# EAGLE board Ubo_side_v1.4 (EAGLE 9.6.2)
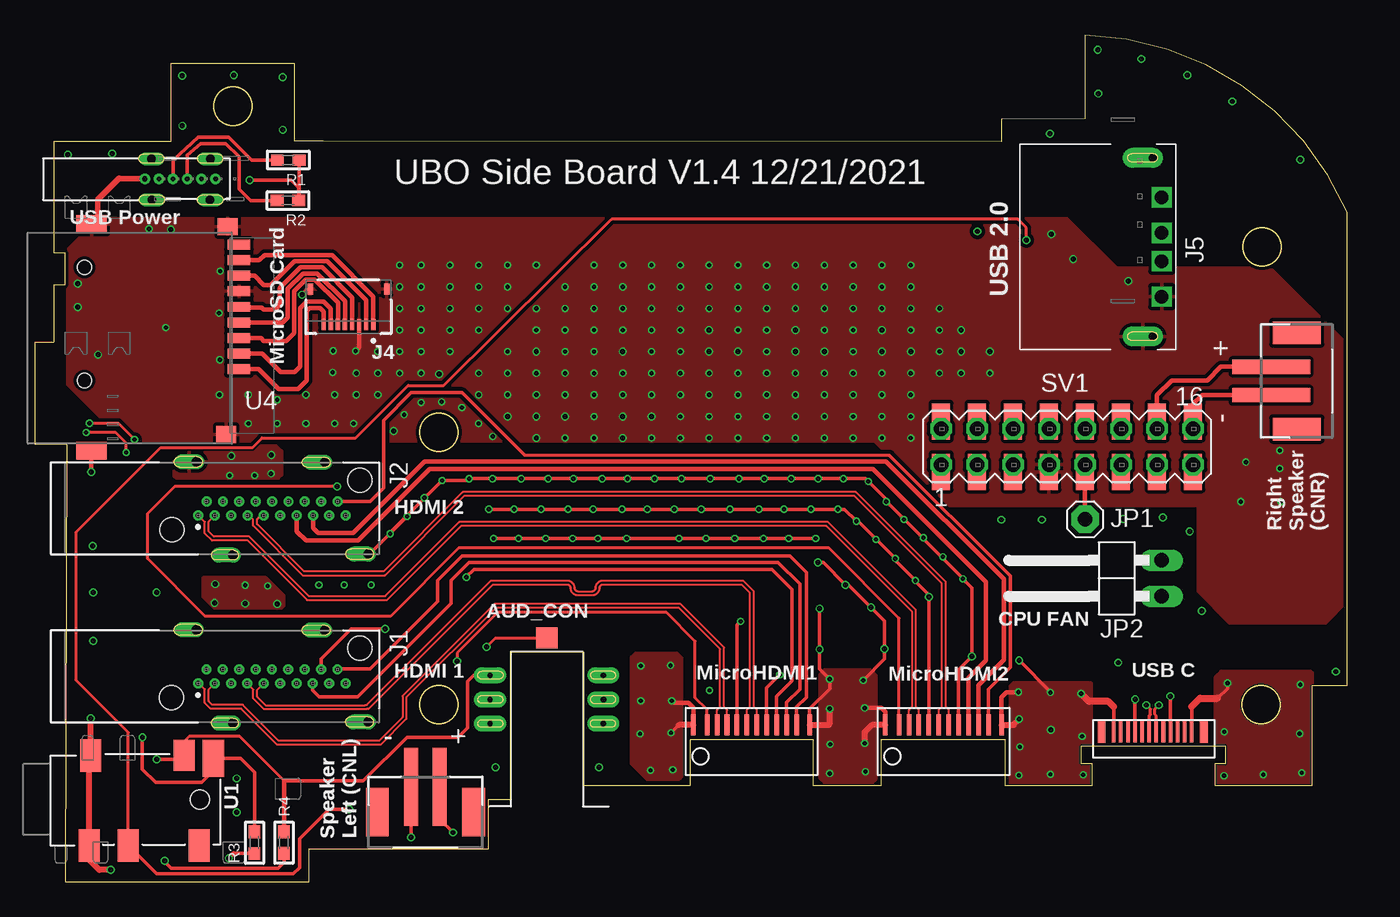
[diagram p0: board, top side]
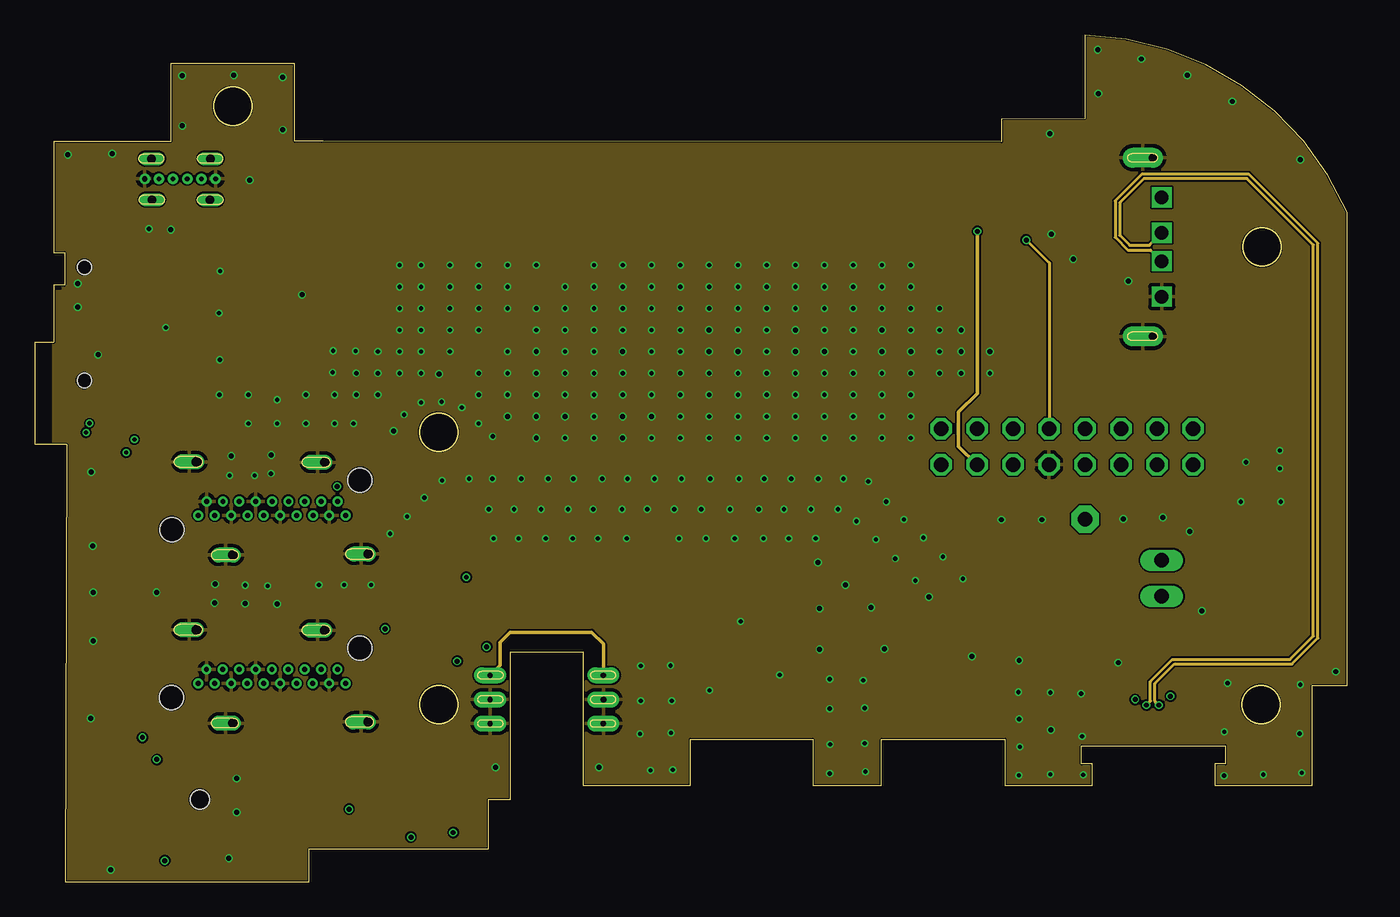
[diagram p1: board, inner layer Route2]
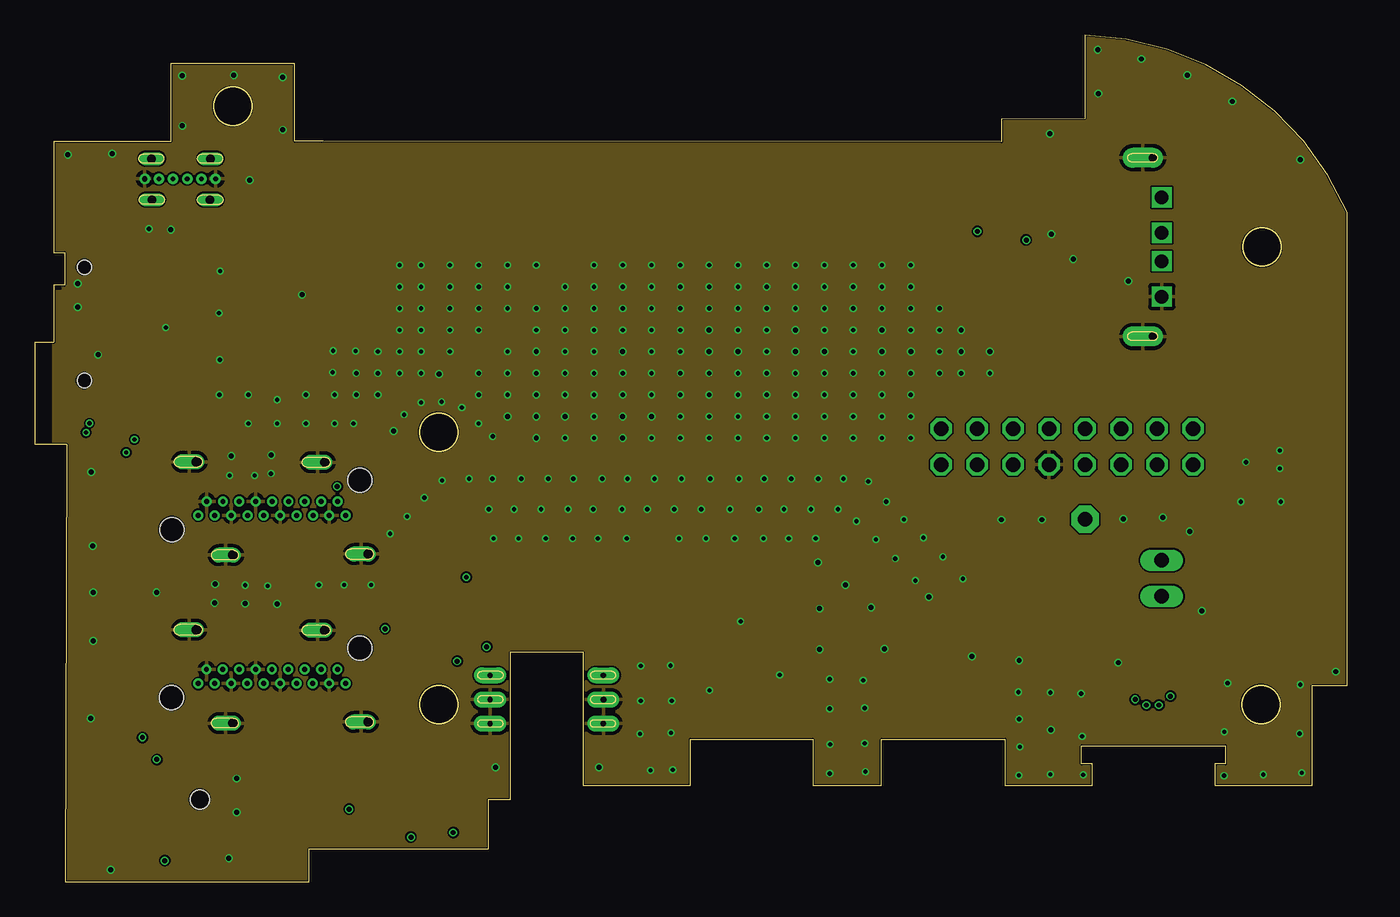
[diagram p2: board, inner layer Route15]
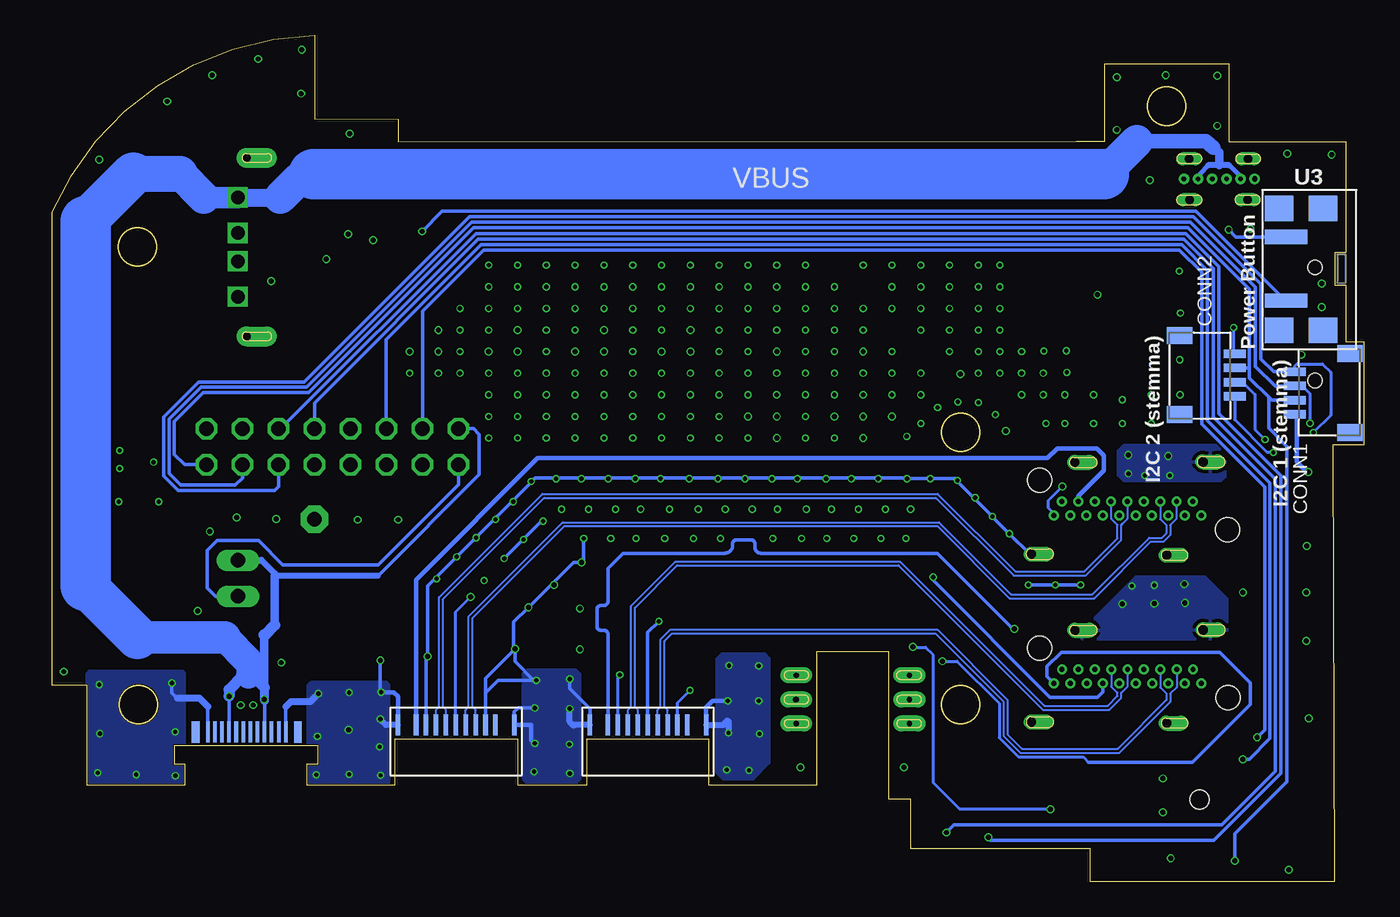
[diagram p3: board, bottom side, seen from below]

Size 92.54 x 59.7 mm. Coordinates in mm from the lower left corner, seen from the top.
Outline: 20.22,52.23 18.3,52.23 18.3,57.71 9.55,57.71 9.55,52.21 1.3,52.21 1.3,44.39 2.06,44.39 2.06,42.08 1.3,42.08 1.3,38.05 0,38.05 0,30.85 2.2,30.85 2.1,0 19.3,0 19.3,2.3 31.97,2.3 31.97,5.8 33.53,5.8 33.53,16.2 38.63,16.2 38.63,6.8 46.2,6.8 46.2,10.04 54.85,10.04 54.85,6.8 59.7,6.8 59.7,10.04 68.4,10.04 68.4,6.8 74.55,6.8 74.55,8.3 73.8,8.3 73.8,9.58 83.95,9.58 83.95,8.3 83.2,8.3 83.2,6.8 90.08,6.8 90.08,13.84 92.54,13.84 92.54,47.22 91.18,49.83 89.47,52.23 87.43,54.35 85.11,56.17 82.56,57.64 79.83,58.73 76.97,59.42 74.04,59.7 74.04,53.84 68.14,53.79 68.14,52.2 20.3,52.25 20.22,52.23
Outline: circle at 13.93,54.71 radius 1.35
Outline: circle at 28.45,31.71 radius 1.35
Outline: circle at 28.45,12.49 radius 1.35
Outline: circle at 86.53,44.78 radius 1.35
Outline: circle at 86.45,12.49 radius 1.35
Copper layers (1*2*15*16): Top 0.035mm / dielectric 0.2mm / Route2 0.0175mm / dielectric 0.465mm / Route15 0.0175mm / dielectric 0.2mm / Bottom 0.035mm
Design rules "jlcpcb-4layers *": minimum track width 5mil, minimum drill 0.2mm, track to track 0.126490625mm, track to pad 0.126490625mm, pad to pad 0.126490625mm, via to via 0.126490625mm, smd to smd 0mil, copper to edge 0.1mm, drill to drill 5mil, minimum pad ring 4mil, minimum via ring 4mil, stop-mask expansion 3mil, vias tented up to drill 100mil, thermal gap 10mil
Net classes: 1 SD CARD: width 0.305 mm

## Footprints (pad centres in the part's own frame; a part is rotated, then mirrored left to right if it is on the bottom)
AUDIO_3.5MM_JACK_MALE = drill 0.381 pad 1.13 long: P$1L 4.95,4; P$1R 4.95,-4; P$2R 3.25,-4; P$3L 1.55,4; P$3R 1.55,-4 | drill 0.4 pad 1.13 long: P$2L 3.25,4 | smd 1.5 x 1.5: P$4 -1.09,0
JST-PH-2-SMT = smd 1 x 5.5: 1 -1,-1.8; 2 1,-1.8 | smd 1.6 x 3.4: NC1 -3.4,0; NC2 3.4,0
JST_SH4 = smd 0.6 x 1.55: 1 -1.5,2.514; 2 -0.5,2.514; 3 0.5,2.514; 4 1.5,2.514 | smd 1.2 x 1.8: MT1 -2.8,-1.386; MT2 2.8,-1.386
CONN_KDMIX-SL1-NS-WS-B15 = drill 0.35 pad 0.7: 1 0.5,-4.725; 2 -0.5,-4.147; 3 0.5,-3.57; 4 -0.5,-2.992; 5 0.5,-2.415; 6 -0.5,-1.837; 7 0.5,-1.26; 8 -0.5,-0.682; 9 0.5,-0.105; 10 -0.5,0.473; 11 0.5,1.05; 12 -0.5,1.628; 13 0.5,2.205; 14 -0.5,2.783; 15 0.5,3.36; 16 -0.5,3.938; 17 0.5,4.515; 18 -0.5,5.093; 19 0.5,5.67 | drill 0.7 offset: S1 -3.277,-4.836; S2 3.302,-2.257; S3 -3.251,4.218; S4 3.226,7.282 | hole 1.7: 1.5,-6.6; -2,6.68
GCT_FFC2B28-08-G = smd 0.3 x 0.8: 1 -1.75,1.25; 2 -1.25,1.25; 3 -0.75,1.25; 4 -0.25,1.25; 5 0.25,1.25; 6 0.75,1.25; 7 1.25,1.25; 8 1.75,1.25 | smd 0.4 x 0.8: S1 -2.7,-1.25; S2 2.7,-1.25
USB-A-RA03B-DT98 = drill 0.95 square: P$1 -3.5,0; P$2 -1,0; P$3 1,0; P$4 3.5,0 | drill 0.6 pad 1.422 offset: SH$1 -6.3,-0.63; SH$2 6.3,-0.63
1X01 = drill 1.016 pad 1.93 octagon: 1 0,0
1X02/90 = drill 1.016 long: 1 -1.27,-3.81; 2 1.27,-3.81
MICRO_HDMI_JTHDDM = smd 0.32 x 1.5 bottom: 1 7.1,0.2; 3 6.4,0.205; 5 5.7,0.2; 7 5,0.2; 9 4.295,0.205; 11 3.6,0.2; 13 2.9,0.205; 15 2.2,0.205; 17 1.5,0.2; 19 0.795,0.2; S2 -0.127,0.203; S4 8.077,0.203 | smd 0.32 x 1.5: 2 6.75,0.2; 4 6.05,0.2; 6 5.35,0.2; 8 4.65,0.2; 10 3.95,0.2; 12 3.25,0.2; 14 2.55,0.2; 16 1.85,0.2; 18 1.15,0.2; S1 -0.127,0.203; S3 8.077,0.203
_0603 = smd 0.9 x 0.8: 1 -0.762,0; 2 0.762,0
MA08X2-FEMALE = drill 1.016 octagon: 1 -8.89,-1.27; 2 -8.89,1.27; 3 -6.35,-1.27; 4 -6.35,1.27; 5 -3.81,-1.27; 6 -3.81,1.27; 7 -1.27,-1.27; 8 -1.27,1.27; 9 1.27,-1.27; 10 1.27,1.27; 11 3.81,-1.27; 12 3.81,1.27; 13 6.35,-1.27; 14 6.35,1.27; 15 8.89,-1.27; 16 8.89,1.27 | smd 1.27 x 2.54: P$1 -8.89,-1.778; P$2 -8.89,1.778; P$3 -6.35,-1.778; P$4 -6.35,1.778; P$5 -3.81,-1.778; P$6 -3.81,1.778; P$7 -1.27,-1.778; P$8 -1.27,1.778; P$9 1.27,-1.778; P$10 1.27,1.778; P$11 3.81,-1.778; P$12 3.81,1.778; P$13 6.35,-1.778; P$14 6.35,1.778; P$15 8.89,-1.778; P$16 8.89,1.778
PJ-3160 = smd 1.5 x 2.3: 1 2.75,-3.25; 2 2.85,3.1; 3 5.5,-3.25; 5 10.5,-3.25 | smd 1.5 x 2.2: 4 9.45,3.1 | smd 1.5 x 2.6: 6 11.5,2.9 | hole 1.35: 10.55,0
USB_20C_F_60CD = drill 0.33 pad 0.737: A5 0,4.56; A9 0,6.56; A12 0,7.56; B5 0,5.56; B9 0,3.56 | drill 0.381 pad 0.737: B12 0,2.56 | drill 0.6 long: P$1 -1.42,3.05; P$2 1.48,3.07; P$3 1.48,7.17; P$4 -1.42,7.19
TS-06105SA-1 = smd 1 x 3: A -2.286,0; B 2.214,0 | smd 1.8 x 2: M1 -4.3,2.6; M2 -4.3,-0.5; M3 4.3,-0.5; M4 4.3,2.6
MICROSDTF-01-H1.8 = smd 1.6 x 0.7: CD$1 10.9,6.55; P$1 10.9,-2.25; P$2 10.9,-1.15; P$3 10.9,-0.05; P$4 10.9,1.05; P$5 10.9,2.15; P$6 10.9,3.25; P$7 10.9,4.35; P$8 10.9,5.45 | smd 2.15 x 1.25: GND$1 0.5,-8; GND$2 0.5,8 | smd 1.4 x 1.2: GND$3 10.1,7.8; GND$4 10,-6.85 | hole 1: 0,-3.05; 0,4.95
USB_TYPE_MALE_31C_J10A = smd 0.25 x 1.49: A1 -2.75,-1.1; A2 -2.25,-1.1; A3 -1.75,-1.1; A4 -1.25,-1.1; A5 -0.75,-1.1; A6 -0.25,-1.1; A7 0.25,-1.1; A8 0.75,-1.1; A9 1.25,-1.1; A10 1.75,-1.1; A11 2.25,-1.1; A12 2.75,-1.1 | smd 0.25 x 1.49 bottom: B1 2.75,-1.1; B2 2.25,-1.1; B3 1.75,-1.1; B4 1.25,-1.1; B5 0.75,-1.1; B6 0.25,-1.1; B7 -0.25,-1.1; B8 -0.75,-1.1; B9 -1.25,-1.1; B10 -1.75,-1.1; B11 -2.25,-1.1; B12 -2.75,-1.1 | smd 0.55 x 1.5: SH$1 3.6,-1.1; SH$3 -3.6,-1.1 | smd 0.55 x 1.5 bottom: SH$2 -3.6,-1.1; SH$4 3.6,-1.1

## Placement (x,y rotation side)
AUD_CON  AUDIO_3.5MMJACK_MALE  [AUDIO_3.5MM_JACK_MALE]  36.07,16.1 270 top
CN_SPK_L  [JST-PH-2-SMT]  27.51,4.9 180 top
CN_SPK_R  [JST-PH-2-SMT]  88.98,35.32 270 top
CONN1  STEMMA_I2C_QT  [JST_SH4]  2.39,34.47 90 bottom
CONN2  STEMMA_I2C_QT  [JST_SH4]  11.64,35.74 270 bottom
J1  HDMI-KDMIX-SL1-NS-WS-B15  [CONN_KDMIX-SL1-NS-WS-B15]  16.21,14.48 270 top
J2  HDMI-KDMIX-SL1-NS-WS-B15  [CONN_KDMIX-SL1-NS-WS-B15]  16.22,26.33 270 top
J4  FFC2B28-08-G  [GCT_FFC2B28-08-G]  22.09,40.55 180 top
J5  USB-A-S-X-X-SM2RA03B-DT98  [USB-A-RA03B-DT98]  79.46,44.77 270 top
JP1  [1X01]  74.05,25.56 0 top
JP2  [1X02/90]  75.65,21.4 90 top
MICROHDMI1  MICRO_HDMI_JTHDDM  [MICRO_HDMI_JTHDDM]  54.49,10.85 0 bottom
MICROHDMI2  MICRO_HDMI_JTHDDM  [MICRO_HDMI_JTHDDM]  68.03,10.85 0 bottom
R1  5.1k  [_0603]  17.84,50.9 180 top
R2  5.1K  [_0603]  17.81,48.06 180 top
R3  100K  [_0603]  15.45,2.75 90 top
R4  1K  [_0603]  17.53,2.75 270 top
SV1  [MA08X2-FEMALE]  72.78,30.69 0 top
U1  AUDIO_SOCKET_JHP_328BPJ-3160  [PJ-3160]  1.05,5.79 0 top
U2  USB-20C-F-06CD-1  [USB_20C_F_60CD]  5.15,49.58 270 top
U3  TS06105SA  [TS-06105SA-1]  5.49,43.2 270 bottom
U4  MICROSDTF01-H1.8  [MICROSDTF-01-H1.8]  3.46,38.4 0 top
USBC  USB_TYPE_MALE_31C_J10C  [USB_TYPE_MALE_31C_J10A]  78.82,11.65 0 top

## Library data of the parts
AUD_CON CN_SPK_L CN_SPK_R CONN1 CONN2 J5 R1-R4 SV1 U1-U4 = Uno
J1 J2 = Uno; COST: $0.4; DESCRIPTION: HDMI Receptacle Connector 19 Position Through Hole, Right Angle; DIGI-KEY_PART_NUMBER: 2092-KDMIX-SL1-NS-WS-B15-ND; MF: Kycon; MF-ALT: Xiamen Jibeili Electronics; MP: KDMIX-SL1-NS-WS-B15; PACKAGE: None
J4 = Uno; AVAILABILITY: In Stock; DESCRIPTION: 8 Position FFC, FPC Connector Contacts, Top and Bottom 0.020 (0.50mm) Surface Mount, Right Angle; MF: Global Connector Technology; MP: FFC2B28-08-G; PACKAGE: None; PRICE: None; PURCHASE-URL: https://pricing.snapeda.com/search/part/FFC2B28-08-G/?ref=eda
JP1 = adafruit
JP2 = pinhead
MICROHDMI1 MICROHDMI2 = Uno; MF: MTCONN ELECTRONICS CO.,LTD; MPN: JTHDDM_0200D1SP79
USBC = Uno; MF: XIAMEN JINBEILI ELECTRONICS CO.,LTD; MPN: USB_31C_M_J10A

## Nets
3.3V: CONN1.2 CONN2.2 R4.2 SV1.15 SV1.P$15
5V_A: J1.18 MICROHDMI1.19
5V_B: J2.18 MICROHDMI2.19
A5: R1.2 U2.A5
B5: R2.2 U2.B5
CEC_A: J1.13 MICROHDMI1.15
CEC_B: J2.13 MICROHDMI2.15
CLK_SD [SD CARD]: J4.4 U4.P$5
CMD_SD [SD CARD]: J4.6 U4.P$3
D_N: J5.P$2 USBC.A6
D_P: J5.P$3 USBC.A7
DAT0 [SD CARD]: J4.2 U4.P$7
DAT1 [SD CARD]: J4.1 U4.P$8
DAT2 [SD CARD]: J4.8 U4.P$1
DAT3 [SD CARD]: J4.7 U4.P$2
DDC_CLOCK_A: J1.15 MICROHDMI1.17
DDC_CLOCK_B: J2.15 MICROHDMI2.17
DDC_DATA_A: J1.16 MICROHDMI1.18
DDC_DATA_B: J2.16 MICROHDMI2.18
FAN_OUT: JP2.1 SV1.1 SV1.P$1
GND: AUD_CON.P$1L AUD_CON.P$1R AUD_CON.P$2L AUD_CON.P$2R CONN1.1 CONN2.1 J1.2 J1.5 J1.8 J1.11 J1.17 J1.S1 J1.S2 J1.S3 J1.S4 J2.2 J2.5 J2.8 J2.11 J2.17 J2.S1 J2.S2 J2.S3 J2.S4 J4.3 J4.S1 J4.S2 J5.P$4 J5.SH$1 J5.SH$2 MICROHDMI1.4 MICROHDMI1.7 MICROHDMI1.10 MICROHDMI1.13 MICROHDMI1.16 MICROHDMI1.S1 MICROHDMI1.S2 MICROHDMI1.S3 MICROHDMI1.S4 MICROHDMI2.4 MICROHDMI2.7 MICROHDMI2.10 MICROHDMI2.13 MICROHDMI2.16 MICROHDMI2.S1 MICROHDMI2.S2 MICROHDMI2.S3 MICROHDMI2.S4 R1.1 R2.1 R3.1 SV1.7 SV1.P$7 U1.1 U1.2 U2.A12 U2.B12 U3.A U4.GND$1 U4.GND$2 U4.GND$3 U4.GND$4 U4.P$6 USBC.A1 USBC.A12 USBC.B1 USBC.B12
GPIO17: SV1.5 SV1.P$5
GPIO27: SV1.3 SV1.P$3 U3.B
HOT_PLUG_A: J1.19 MICROHDMI1.1
HOT_PLUG_B: J2.19 MICROHDMI2.1
HP_DETECT: R3.2 SV1.4 SV1.P$4 U1.6
LINEOUT_L: AUD_CON.P$3L AUD_CON.P$3R R4.1 SV1.6 SV1.P$6 U1.4
LINEOUT_R: AUD_CON.P$4 SV1.8 SV1.P$8 U1.3
N$1: JP1.1 SV1.9 SV1.P$9
SCL: CONN1.4 CONN2.4 SV1.11 SV1.P$11
SDA: CONN1.3 CONN2.3 SV1.13 SV1.P$13
SPK_LN: CN_SPK_L.2 SV1.12 SV1.P$12
SPK_LP: CN_SPK_L.1 SV1.10 SV1.P$10
SPK_RN: CN_SPK_R.2 SV1.16 SV1.P$16
SPK_RP: CN_SPK_R.1 SV1.14 SV1.P$14
TMDS_CLOCK_A_N: J1.12 MICROHDMI1.14
TMDS_CLOCK_A_P: J1.10 MICROHDMI1.12
TMDS_CLOCK_B_N: J2.12 MICROHDMI2.14
TMDS_CLOCK_B_P: J2.10 MICROHDMI2.12
TMDS_D0_A_N: J1.9 MICROHDMI1.11
TMDS_D0_A_P: J1.7 MICROHDMI1.9
TMDS_D0_B_N: J2.9 MICROHDMI2.11
TMDS_D0_B_P: J2.7 MICROHDMI2.9
TMDS_D1_A_N: J1.6 MICROHDMI1.8
TMDS_D1_A_P: J1.4 MICROHDMI1.6
TMDS_D1_B_N: J2.6 MICROHDMI2.8
TMDS_D1_B_P: J2.4 MICROHDMI2.6
TMDS_D2_A_N: J1.3 MICROHDMI1.5
TMDS_D2_A_P: J1.1 MICROHDMI1.3
TMDS_D2_B_N: J2.3 MICROHDMI2.5
TMDS_D2_B_P: J2.1 MICROHDMI2.3
VBUS: J5.P$1 JP2.2 SV1.2 SV1.P$2 U2.A9 U2.B9 USBC.A4 USBC.A9 USBC.B4 USBC.B9
VDD_SD: J4.5 U4.P$4

## Tracks (layer width: path | path; a pad name or v marks a point on that pad's centre or on a via)
3.3V  (via drill 0.35)
  Top 0.152: SV1.P$15 SV1.15
  Top 0.254: R4.2 17.53,1.35 17.13,0.94 9.58,0.94 9.12,1.4 v9.12,1.48
  Bottom 0.254: SV1.15 83.22,29.42 83.93,30.13 83.93,32.46 81.89,34.5 74.45,34.5 62.82,46.13 12.43,46.13 8.08,41.79 8.08,36.25 | 8.08,36.25 8.08,35.54 6.74,34.19 | 6.74,34.19 6.51,33.97 CONN1.2 | v9.12,1.48 9.12,3.36 5.44,7.04 5.44,30.71 6.74,32.01 6.74,34.19 | CONN2.2 8.09,36.24 8.08,36.25
5V_A
  Top 0.254: J1.18 23.6,14.99 28.38,19.76 28.38,21.24 30.1,22.96 53.24,22.96 54.39,21.82 54.39,13.01 53.69,12.32 MICROHDMI1.19
5V_B
  Top 0.254: J2.18 23.63,26.83 24.55,27.75 24.55,32.55 26.5,34.5 30.1,34.5 34.5,30.1 60.26,30.08 68.77,21.57 68.77,15.1 67.23,13.57 MICROHDMI2.19
A5
  Top 0.254: U2.A5 9.7,50.91 11.49,52.51 13.64,52.51 15.24,50.9 R1.2
B5
  Top 0.254: U2.B5 10.72,51.25 11.67,52.07 13.43,52.07 14.36,51.14 14.36,48.87 15.17,48.06 R2.2
CEC_A  (via drill 0.35)
  Top 0.254: v30.4,21.48 30.95,22.03 51.95,22.03 53.37,20.6 53.37,14.15 52.29,13.07 MICROHDMI1.15
  Bottom 0.254: v30.4,21.48 30.4,21.25 22.16,13.01 18.8,13.01 18.41,13.39 J1.13
CEC_B
  Top 0.305: MICROHDMI2.15 65.83,14.38 67.04,15.6 67.04,21.15 59.07,29.11 27.82,29.11 22.76,24.06 19.08,24.06 18.42,24.71 J2.13
CLK_SD
  Top 0.305: U4.P$5 14.41,40.5 15.96,40.5 16.11,40.35 16.9,40.35 17.23,40.67 17.23,41.86 18.71,43.34 20.21,43.34 22.34,41.22 J4.4
CMD_SD
  Top 0.305: U4.P$3 15.91,38.35 16.11,38.15 17.69,38.15 18.24,38.7 18.24,41.65 19.07,42.48 19.7,42.48 21.34,40.85 J4.6
D_N  (via drill 0.35)
  Top 0.203: USBC.A6 78.57,11.7 78.66,11.79 78.66,12.17 v78.38,12.45
  Route2 0.203: v78.38,12.45 78.66,12.73 78.66,14.11 80.22,15.68 88.5,15.68 90.15,17.33 90.15,44.91 85.46,49.6 78.2,49.6 76.5,47.9 76.5,45.6 77.2,44.9 78.59,44.9 J5.P$2
D_P  (via drill 0.35)
  Top 0.203: USBC.A7 79.07,11.7 78.99,11.79 78.99,12.17 v79.26,12.45
  Route2 0.203: v79.26,12.45 78.99,12.73 78.99,13.97 80.36,15.35 88.63,15.35 90.48,17.19 90.48,45.05 85.6,49.93 78.06,49.93 76.17,48.04 76.17,45.46 77.06,44.57 78.66,44.57 J5.P$3
DAT0
  Top 0.305: U4.P$7 15.46,42.75 16.11,42.1 16.61,42.1 18.29,43.78 20.59,43.78 23.34,41.03 J4.2
DAT1
  Top 0.305: U4.P$8 15.8,43.85 16.16,44.21 20.92,44.21 23.84,41.29 J4.1
DAT2
  Top 0.305: U4.P$1 15.76,36.15 17.16,34.75 18.55,34.75 19.15,35.35 19.15,40.25 19.35,40.45 20.1,40.45 20.34,40.21 J4.8
DAT3
  Top 0.305: U4.P$2 16.01,37.25 17.31,35.95 18.27,35.95 18.67,36.35 18.67,40.48 19.12,40.93 20.33,40.93 20.84,40.42 J4.7
DDC_CLOCK_A
  Top 0.254: J1.15 19.57,13.48 20.02,13.03 22.73,13.03 29.32,19.62 29.32,21.26 30.59,22.53 52.38,22.53 53.93,20.98 53.93,13.57 52.99,12.63 MICROHDMI1.17
DDC_CLOCK_B
  Top 0.305: J2.15 19.59,24.95 19.94,24.59 22.41,24.59 27.46,29.64 60.01,29.64 68.3,21.35 68.3,15.62 66.53,13.85 MICROHDMI2.17
  Top 0.33: J2.15
DDC_DATA_A  (via drill 0.35)
  Top 0.254: J1.16 20.15,15.73 22.25,17.83 v24.67,17.83
  Bottom 0.254: MICROHDMI1.18 53.34,17.44 arc-90 53.62,17.73 53.83,17.73 arc90 54.12,18.01 54.12,19.19 arc90 53.83,19.48 53.62,19.48 arc-90 53.34,19.76 53.34,22.11 52.28,23.17 45.09,23.17 arc-90 44.55,23.71 44.55,23.82 arc90 44.26,24.11 43.26,24.11 arc90 42.97,23.82 42.97,23.58 arc-90 42.56,23.17 30.1,23.17 24.77,17.83 v24.67,17.83
DDC_DATA_B
  Bottom 0.305: MICROHDMI2.18 66.88,21.3 58.3,29.87 22.33,29.87 21.64,30.56 18.85,30.56 18.34,30.05 18.34,29.02 20.16,27.21 J2.16
FAN_OUT
  Top 0.254: SV1.P$1 SV1.1
  Bottom 0.254: SV1.1 63.89,28 69.55,22.33 76.28,22.33 78,24.05 80.9,24.05 81.6,23.35 81.6,20.7 81.03,20.13 JP2.1
GND  (via drill 0.3, 0.35)
  Top 0.152: J4.S2 19.09,41.8 18.8,41.52 v18.8,41.4 | 4.24,30.28 4.12,30.4 U4.GND$1
  Top 0.254: 45.04,12.6 v44.89,12.75 | 45.39,11.05 v44.84,10.49 | R1.1 18.6,48.08 R2.1 18.57,48.95 18.04,49.48 v15.12,49.48 | R3.1 13.98,1.98 | MICROHDMI1.13 51.59,13.66 v52.51,14.58 | MICROHDMI1.7 49.49,18.1 v49.75,18.36 | MICROHDMI1.S1 54.61,12.17 56.04,13.59 v56.04,14.28 55.33,14.99 v55.33,19.26 | MICROHDMI2.13 65.13,14.93 v66.07,15.88 66.07,20.73 v65.44,21.37 65.44,21.39 v60.02,26.8 60.02,26.95 v58.75,28.22 58.55,28.43 v30.59,28.43 30.46,28.3 v28.68,28.3 25.02,24.64 v25.02,24.54 | v63.03,20.09 MICROHDMI2.7 | USBC.B1 81.57,12.35 | 83.39,12.93 84.1,13.64 v84.1,14 | USBC.A1 76.07,12.33 | v63.02,20.1 63.02,20.22 62.08,21.16 v62.08,21.24 60.66,22.66 v60.66,22.79 58.02,25.43 v57.92,25.43 57.08,26.27 v56.62,26.27 v31.98,26.27 | v32.31,24.21 v41.71,24.21 v45.39,24.21 v55.05,24.21 | v55.2,22.51 55.58,22.51 v57.15,20.93 57.36,20.93 v58.96,19.33 59.9,18.39 v59.9,16.41 59.9,15.7 v58.4,14.2 | v69.4,15.6 71.61,13.39 v71.61,13.34 | v26.22,25.76 23.57,23.11 J2.S4
  Top 0.305: MICROHDMI1.S3 46.41,12.25 46.05,12.6 45.04,12.6 | MICROHDMI2.S1 68.15,13.01 68.51,13.36 v69.35,13.36 | MICROHDMI2.S3 59.95,11.97 59.67,12.25 v58.5,12.25 | v63.02,20.1 v63.03,20.09 | 13.98,1.98 v13.65,1.65 | J4.3 22.84,37.67 v22.59,37.43 | 4.24,30.28 3.94,29.98 v3.94,28.91 | 4.38,47.28 4.36,47.26 4.36,46.8 U4.GND$2
  Top 0.381: U2.B12 5.95,49.58 5.9,49.63 4.38,48.12 4.38,47.28
  Top 0.406: MICROHDMI1.S3 45.39,11.05 | MICROHDMI2.S1 68.99,11.05 v69.4,11.46 | MICROHDMI2.S3 59.01,11.05 58.5,10.54 v58.5,9.76 | v3.89,11.51 3.89,11.48 3.9,11.48 U1.2 3.8,8.79 U1.1 3.8,1.54 4.51,0.83 v5.31,0.83 v5.31,0.84 | MICROHDMI1.S1 55.96,11.05 56.04,11.13 v56.04,12.2
  Top 0.508: 83.39,12.93 82.15,12.93 81.57,12.35 | v73.77,13.26 74.33,12.7 75.7,12.7 76.07,12.33
  Bottom 0.203: MICROHDMI1.4 48.44,12.61 v47.55,13.49 | MICROHDMI1.16 52.64,14.45 v52.51,14.58 | MICROHDMI2.10 64.08,19.04 v63.02,20.1 | MICROHDMI2.4 61.98,13.32 | v9.2,39.09 9.23,39.06 9.23,37.35 CONN2.1
  Bottom 0.254: MICROHDMI1.S1 54.61,12.2 56.04,13.62 v56.04,14.28 | 61.98,13.32 61.09,14.2 58.58,14.2 | 58.58,14.2 v58.4,14.2 | MICROHDMI2.S3 59.95,11.97 59.64,12.27 58.53,12.27 v58.5,12.25 | USBC.A1 76.07,12.33 | USBC.B1 81.57,12.35 | 83.72,12.93 84.1,13.31 v84.1,14 | v9.56,46 9.04,45.49 U3.A | v19.99,20.93 v21.77,20.93 v23.68,20.93 | v60.66,22.79 59.31,24.13 | 59.31,24.13 v59.29,24.13 | v57.92,25.43 58.02,25.43 59.31,24.13 | v55.05,24.21 55.05,22.66 v55.2,22.51 55.78,22.51 v58.96,19.33 59.99,18.3 59.99,16.32 | 59.99,16.32 v59.9,16.41 59.9,15.52 58.58,14.2 | 59.99,16.32 61.98,14.33 MICROHDMI2.4 | v69.4,15.6 69.4,13.41 v69.35,13.36 | J2.S4 23.59,23.11 v25.02,24.54 26.22,25.73 v26.22,25.76 28.68,28.22 v28.68,28.3 28.81,28.43 v32.24,28.43 32.29,28.48 58.5,28.48 v58.75,28.22 58.75,28.17 v64.01,22.91 66.07,20.86 v66.07,15.88 66.18,15.77 MICROHDMI2.16 | MICROHDMI1.10 50.54,17.57 v49.75,18.36
  Bottom 0.305: MICROHDMI1.S3 46.41,12.3 45.95,12.75 v44.89,12.75 | MICROHDMI2.S1 68.15,13.06 68.46,13.36 v69.35,13.36 | v58.5,9.76 58.75,10.01 58.75,11.05 58.76,11.05 MICROHDMI2.S3 | CONN1.1 4.73,32.79 4.73,29.59 4.04,28.91 v3.94,28.91
  Bottom 0.406: MICROHDMI1.S3 45.22,11.05 44.91,11.36 44.84,11.28 v44.84,10.49 | MICROHDMI2.S1 68.99,11.05 v69.4,11.46 | MICROHDMI1.S1 55.71,11.05 55.76,11 56.04,11.28 v56.04,12.2
  Bottom 0.508: 76.07,12.33 75.7,12.7 74.33,12.7 v73.77,13.26 | 83.72,12.93 82.15,12.93 81.57,12.35
  other vias: 42.7,15.22 44.81,15.24 44.96,7.88 43.39,7.85 42.65,10.42 42.7,12.75 69.45,9.5 69.37,7.5 71.61,7.57 73.92,7.52 73.84,10.24 89.23,13.9 89.34,7.67 83.85,7.47 83.88,10.57 89.18,10.44 86.62,7.55 58.55,7.75 56.04,7.62 56.06,9.68 47.53,37.39 41.43,37.39 47.53,38.92 49.56,37.39 41.43,31.3 41.43,32.82 43.46,32.82 71.68,45.67 73.21,43.92 47.53,41.96 41.43,41.96 19.08,34.34 30.08,33.44 12.95,40.12 41.43,43.49 45.5,41.96 41.43,35.87 45.5,34.34 45.5,32.82 49.56,34.34 47.53,34.34 47.53,32.82 49.56,32.82 49.56,31.3 47.53,31.3 49.56,35.87 45.5,31.3 45.5,35.87 43.46,31.3 43.46,34.34 41.43,34.34 43.46,37.39 87.79,29.14 87.79,30.41 85.4,29.59 85.04,26.8 87.86,26.8 45.5,40.44 45.5,38.92 41.43,38.92 41.43,40.44 43.46,41.96 49.56,40.44 49.56,43.49 49.56,41.96 47.53,40.44 49.56,38.92 43.46,43.49 47.53,43.49 43.46,40.44 43.46,38.92 45.5,43.49 21.11,34.34 12.98,34.34 47.53,35.87 45.5,37.39 43.46,35.87 84.43,55.04 81.26,56.9 78.01,58.04 74.93,58.7 74.99,55.6 71.56,52.76 17.45,53.04 17.43,56.75 10.34,56.85 14,56.9 10.37,53.32 2.29,51.29 5.41,51.36 2.98,40.54 4.04,23.68 4.07,20.4 4.07,16.97 14.2,7.27 14.2,4.88 32.47,8.06 39.76,8.06 71.63,10.7 76.38,15.45 79.53,25.68 82.28,19.11 81.42,24.71 76.74,25.58 71,25.53 68.15,25.53 91.72,14.81 89.23,50.93 77.1,42.36 55.33,16.39 8.54,20.4 12.63,19.66 14.79,19.61 17.05,19.59 13.82,30.03 16.64,30.1 34.27,28.43 36.17,28.43 37.95,28.43 39.98,28.43 41.76,28.43 43.67,28.43 45.57,28.43 47.6,28.43 49.64,28.43 51.41,28.43 53.32,28.43 55.22,28.43 57,28.43 33.76,26.27 35.67,26.27 37.57,26.27 39.35,26.27 41.38,26.27 43.16,26.27 45.06,26.27 46.97,26.27 49,26.27 51.03,26.27 52.81,26.27 54.72,26.27 27.44,27.08 61.27,25.56 62.64,24.26 34.09,24.21 36,24.21 37.9,24.21 39.68,24.21 47.3,24.21 49.33,24.21 51.36,24.21 53.14,24.21 13.7,28.65 15.47,28.65 16.62,28.78 12.68,20.98 14.79,20.91 16.39,20.86 15.02,32.31 2.98,42.19 21.11,32.31 8.01,46.05 19.08,32.31 17.05,32.31 24.16,34.34 15.02,34.34 4.42,37.17 26.01,32.94 31.26,32.31 17.05,33.99 53.62,37.39 53.62,38.92 55.66,37.39 53.62,41.96 51.59,41.96 51.59,34.34 51.59,32.82 55.66,34.34 53.62,34.34 53.62,32.82 55.66,32.82 55.66,31.3 53.62,31.3 55.66,35.87 51.59,31.3 51.59,35.87 51.59,40.44 51.59,38.92 55.66,40.44 55.66,43.49 55.66,41.96 53.62,40.44 55.66,38.92 53.62,43.49 51.59,43.49 53.62,35.87 51.59,37.39 59.72,37.39 59.72,38.92 61.75,37.39 59.72,41.96 57.69,41.96 57.69,34.34 57.69,32.82 61.75,34.34 59.72,34.34 59.72,32.82 61.75,32.82 61.75,31.3 59.72,31.3 61.75,35.87 57.69,31.3 57.69,35.87 57.69,40.44 57.69,38.92 61.75,40.44 61.75,43.49 61.75,41.96 59.72,40.44 61.75,38.92 59.72,43.49 57.69,43.49 59.72,35.87 57.69,37.39 65.31,37.39 65.31,38.92 67.34,37.39 67.34,35.87 63.78,35.87 63.78,40.44 63.78,38.92 65.31,35.87 63.78,37.39 35.34,37.39 35.34,31.3 35.34,32.82 37.37,32.82 39.4,41.96 35.34,35.87 39.4,34.34 39.4,32.82 39.4,31.3 39.4,35.87 37.37,31.3 37.37,34.34 35.34,34.34 37.37,37.39 39.4,40.44 39.4,38.92 35.34,38.92 37.37,41.96 37.37,40.44 37.37,38.92 39.4,43.49 39.4,37.39 37.37,35.87 25.27,31.8 28.47,35.82 33.3,32.82 31.27,35.87 27.2,33.8 33.3,34.34 31.27,34.34 33.3,37.39 33.3,35.87 33.3,41.96 33.3,43.49 33.3,40.44 35.34,43.49 35.34,40.44 31.27,41.96 31.27,40.44 31.27,43.49 13.03,43.08 31.27,38.92 22.44,32.31 13.01,36.81 21,37.45 20.97,35.93 25.68,41.96 25.68,40.44 25.68,43.49 29.24,41.96 29.24,43.49 29.24,40.44 27.21,41.96 27.21,40.44 27.21,43.49 25.68,38.92 25.68,37.39 29.24,38.92 29.24,37.39 27.21,38.92 27.21,37.39 27.21,35.87 25.68,35.87 24.16,35.87 22.64,35.87 24.16,37.39 22.64,34.34 28.65,33.84 32.26,31.41
  pour Route15: 1.3,41.63 1.3,-0.2 19.26,-0.2 19.26,2.34 31.97,2.34 31.97,5.92 33.53,5.92 33.53,16.14 38.63,16.14 38.63,6.82 46.2,6.82 46.2,10.04 54.82,10.04 54.82,6.76 59.65,6.76 59.65,9.94 68.42,9.94 68.42,6.76 74.59,6.76 74.59,9.58 83.17,9.58 83.17,6.76 90.08,6.76 90.08,13.84 92.54,13.84 92.54,47.22 91.18,49.84 89.47,52.23 87.43,54.35 85.11,56.17 82.56,57.64 79.83,58.73 76.97,59.42 74.04,59.7 74.04,53.84 68.15,53.79 68.15,52.2 20.3,52.25 20.22,52.23 18.3,52.23 18.3,57.71 9.55,57.71 9.55,52.21 1.3,52.21 1.3,43.84 1.96,43.84 1.96,41.63
  pour Route2: 1.3,41.63 1.3,0.8 arc90 2.3,-0.2 19.26,-0.2 19.26,2.34 31.97,2.34 31.97,5.92 33.53,5.92 33.53,16.14 38.63,16.14 38.63,6.82 46.2,6.82 46.2,10.04 54.82,10.04 54.82,6.76 59.65,6.76 59.65,9.94 68.42,9.94 68.42,6.76 74.59,6.76 74.59,9.58 83.17,9.58 83.17,6.76 90.08,6.76 90.08,13.84 92.54,13.84 92.54,47.22 91.18,49.84 89.47,52.23 87.43,54.35 85.11,56.17 82.56,57.64 79.83,58.73 76.97,59.42 74.04,59.7 74.04,53.84 68.15,53.79 68.15,52.2 20.3,52.25 20.22,52.23 18.3,52.23 18.3,57.71 9.55,57.71 9.55,52.21 1.3,52.21 1.3,43.84 1.96,43.84 1.96,41.63
  pour Top: 42.32,16.13 42.02,15.83 42.02,8.31 43.11,7.22 45.42,7.22 45.62,7.42 45.62,15.78 45.29,16.11
  pour Bottom (rank 2): 41.97,15.75 41.97,8.36 43.11,7.22 45.19,7.22 45.65,7.67 45.65,15.75 45.29,16.11 42.35,16.13
  pour Top: 59.31,7.22 59.31,14.56 58.93,14.94 55.66,14.94 55.33,14.61 55.33,7.29 55.66,6.96 59.06,6.96
  pour Bottom: 55.33,7.22 55.33,14.66 55.61,14.94 59.03,14.94 59.31,14.66 59.31,7.22 59.06,6.96 55.58,6.96
  pour Bottom: 74.3,14.05 74.53,13.82 74.53,6.99 74.33,6.79 68.76,6.79 68.76,13.85 68.99,14.07
  pour Top: 68.97,14.02 68.74,13.8 68.74,6.89 68.76,6.86 68.86,6.76 74.53,6.76 74.53,13.97 74.45,14.05
  pour Bottom: 83.32,14.84 89.95,14.84 90.1,14.68 90.1,6.71 83.37,6.71 83.19,6.89 83.19,14.71
  pour Top: 89.97,14.84 83.62,14.84 83.37,14.58 83.22,14.43 83.22,6.71 90.05,6.71 90.12,6.79 90.12,14.71 90,14.84
  pour Top (isolate 0.254): 4.5,46.79 72.78,46.79 76.28,43.28 87.13,43.28 92.54,37.87 92.54,19.79 91.01,18.27 84.23,18.27 82.02,20.48 82.02,26.52 63.76,26.52 59.19,31.09 6.28,31.09 2.29,35.08 2.29,44.58
  pour Bottom: 19.92,17.12 10.19,17.12 9.66,17.66 9.66,19.94 11.21,21.49 16.11,21.49 19.92,17.68
  pour Bottom: 17,28.3 10.06,28.3 9.78,28.58 9.78,30.36 10.19,30.76 17,30.76 17.38,30.38 17.38,28.68
  pour Top: 17.12,28.43 9.94,28.43 9.78,28.58 9.78,30.36 10.19,30.76 17,30.76 17.38,30.38 17.38,28.68
  pour Top: 17.38,19.28 12.6,19.28 11.84,20.04 11.84,21.49 16.24,21.49 17.51,20.22 17.51,19.41
GPIO17
  Top 0.254: SV1.P$5 SV1.5
GPIO27  (via drill 0.35)
  Top 0.254: SV1.P$3 SV1.3
  Route2 0.254: v66.45,45.88 66.45,34.45 65.13,33.12 65.13,30.71 SV1.3
  Bottom 0.254: U3.B 5.54,40.99 11.85,47.3 65.03,47.3 v66.45,45.88
HOT_PLUG_A  (via drill 0.35)
  Top 0.203: MICROHDMI1.1 47.39,12.13 46.55,12.97 46.55,16.95 44.52,18.98 32.61,18.98 29.75,16.12 v29.75,15.55
  Bottom 0.203: v29.75,15.55 28.71,15.55 25.73,12.58 25.73,10.15 24.38,8.79 19.82,8.79 19.44,8.41
  Bottom 0.254: J1.19 22.38,14.48 22.38,15.17 21.37,16.18 10.19,16.18 8.03,14.02 8.03,12.5 12.12,8.41 19.44,8.41
HOT_PLUG_B  (via drill 0.35)
  Top 0.203: MICROHDMI2.1 60.93,18.58 55.99,23.52 29.85,23.52 25.05,18.72 11.96,18.72 7.9,22.78 7.9,25.96 9.81,27.87 v21.29,27.87
  Bottom 0.203: J2.19 21.89,25.98 22.25,26.34 22.25,26.9 v21.29,27.87
HP_DETECT  (via drill 0.35)
  Top 0.152: SV1.P$4 SV1.4
  Top 0.254: R3.2 15.45,7.72 14.48,8.69 U1.6 12.58,8.67 12.58,7.85 11.71,6.99 8.49,6.99 7.55,7.93 v7.55,10.16
  Bottom 0.254: SV1.4 66.43,40.26 62.13,44.55 13.03,44.55 11.46,42.99 11.46,32.27 7.01,27.82 7.01,10.7 v7.55,10.16
LINEOUT_L  (via drill 0.35)
  Top 0.152: SV1.P$6 SV1.6
  Top 0.203: U1.4 10.5,9.89 10.88,10.27 14.36,10.27 17.53,7.09
  Top 0.254: AUD_CON.P$3R 30.9,14.55 30.48,14.13 30.48,10.85 29.82,10.19 26.23,10.19 23.13,7.09 17.53,7.09 | 17.53,3.63 R4.1 | v8.56,8.61 10.22,8.61 U1.4
  Top 0.305: 17.53,3.63 17.53,7.09
  Route2 0.254: AUD_CON.P$3R 32.77,15.25 32.77,16.87 33.48,17.58 39.25,17.58 40.07,16.75 AUD_CON.P$3L
  Bottom 0.254: SV1.6 68.99,31.98 68.99,38.23 62.28,44.94 12.87,44.94 11.05,43.12 11.05,32.53 6.63,28.11 6.63,10.09 8.11,8.61 v8.56,8.61
LINEOUT_R  (via drill 0.35)
  Top 0.152: SV1.P$8 SV1.8
  Top 0.203: v31.83,16.56 32.45,17.19 AUD_CON.P$4 | v69.91,45.27 69.91,46.13 69.3,46.74 40.64,46.74 28.8,35 26.3,35 22.6,31.3 15.99,31.3 15.32,30.62 8.84,30.62 2.85,24.64 2.85,14.23 6.55,10.53 U1.3
  Top 0.254: U1.3 8.56,0.53 18.19,0.53 18.62,0.97 18.62,3.03 20.71,5.11 v22.13,5.11
  Route2 0.203: v69.91,45.27 71.53,43.64 71.53,31.98
  Route2 0.254: 71.53,31.98 SV1.8
  Bottom 0.203: v22.13,5.11 28.53,5.11 30.38,6.97 30.38,15.98 30.94,16.54 31.8,16.54 v31.83,16.56
N$1
  Top 0.305: JP1.1 SV1.P$9 SV1.9
SCL  (via drill 0.3)
  Top 0.152: SV1.P$11 SV1.11
  Top 0.203: v6.41,30.28 6.41,30.93 5.67,31.67 v3.58,31.67 v3.57,31.68
  Bottom 0.203: CONN2.4 9.12,32.59 6.81,30.28 v6.41,30.28 | CONN1.4 4.9,36.37 4.74,36.53 2.95,36.53 2.35,35.94 2.35,32.9 v3.57,31.68
  Bottom 0.254: SV1.11 76.59,27.87 76.86,27.59 83.65,27.59 84.69,28.62 84.69,32.78 82.21,35.26 74.77,35.26 63.11,46.92 12.06,46.92 7.29,42.15 7.29,36.88 6.38,35.97 CONN1.4
SDA  (via drill 0.3)
  Top 0.152: SV1.P$13 79.13,28.43 79.08,28.38 79.08,29.37 SV1.13
  Top 0.203: v6.99,31.19 5.86,32.32 3.88,32.32 3.87,32.34 v3.82,32.34
  Bottom 0.203: CONN2.3 8.57,35.24 7.7,34.37 7.7,31.91 v6.99,31.19 | CONN1.3 4.36,34.97 3.82,34.43 v3.82,32.34
  Bottom 0.254: SV1.13 79.13,28.48 79.63,27.97 83.49,27.97 84.31,28.78 84.31,32.62 82.05,34.88 74.61,34.88 62.95,46.54 12.27,46.54 7.67,41.94 7.67,36.35 6.28,34.95 4.92,34.95 CONN1.3
SPK_LN  (via drill 0.35)
  Top 0.152: SV1.P$12 SV1.12
  Top 0.254: v26.5,3.13 26.5,6.68 CN_SPK_L.2
  Bottom 0.254: SV1.12 76.43,31.96 62.66,45.72 12.58,45.72 10.24,43.39 10.24,33.02 5.87,28.65 5.87,7.62 10.6,2.9 26.34,2.9 26.5,3.05 v26.5,3.13
SPK_LP  (via drill 0.35)
  Top 0.152: SV1.P$10 SV1.10
  Top 0.254: v29.47,3.46 28.53,4.4 28.53,6.68 CN_SPK_L.1
  Bottom 0.254: SV1.10 74.05,33.77 62.5,45.32 12.71,45.32 10.65,43.25 10.65,32.79 6.25,28.39 6.25,7.78 10.04,3.99 28.94,3.99 v29.47,3.46
SPK_RN
  Top 0.152: SV1.P$16 SV1.16
  Top 0.305: CN_SPK_R.2 82.3,34.32 81.67,33.68 SV1.16
SPK_RP
  Top 0.152: SV1.P$14 SV1.14
  Top 0.305: SV1.P$14 79.13,34.32 80.17,35.36 82.68,35.36 83.64,36.32 CN_SPK_R.1
TMDS_CLOCK_A_N
  Bottom 0.127: J1.12 17.84,13.77 17.83,13.76 17.83,13.75 17.4,13.32
  Bottom 0.152: MICROHDMI1.14 51.94,12.11 51.73,12.32 51.73,19.44 48.58,22.58 32.73,22.58 22.55,12.4 18.09,12.4 17.4,13.08 17.4,13.32
TMDS_CLOCK_A_P
  Bottom 0.127: J1.10 16.68,13.78 16.69,13.77 16.69,13.75 17.02,13.41 17.12,13.31
  Bottom 0.152: MICROHDMI1.12 51.24,12.11 51.45,12.32 51.45,19.32 48.47,22.3 32.85,22.3 22.66,12.12 17.97,12.12 17.12,12.97 17.12,13.31
TMDS_CLOCK_B_N
  Bottom 0.127: J2.12 17.85,25.62 17.84,25.61 17.84,25.6 17.4,25.16
  Bottom 0.152: MICROHDMI2.14 65.48,12.11 65.27,12.32 65.27,20.05 57.96,27.36 30.09,27.36 24.6,21.87 19.75,21.87 17.4,24.21 17.4,25.16
TMDS_CLOCK_B_P
  Bottom 0.127: J2.10 16.69,25.61 16.7,25.6 17.03,25.26 17.04,25.26 17.12,25.18
  Bottom 0.152: MICROHDMI2.12 64.78,12.11 64.99,12.32 64.99,19.93 57.84,27.08 30.21,27.08 24.71,21.59 19.63,21.59 17.12,24.09 17.12,25.18
TMDS_D0_A_N
  Top 0.152: MICROHDMI1.11 50.89,12.11 50.68,12.31 50.68,20.49 49.93,21.24 40.03,21.24 arc90 39.52,20.72 arc-90 39.29,20.49 38.26,20.49 arc-90 38.02,20.72 arc90 37.51,21.24 32.16,21.24 23.37,12.45 23.26,12.45 23.25,12.44 16.24,12.44 15.65,13.03 15.65,13.53 J1.9
TMDS_D0_A_P
  Top 0.152: MICROHDMI1.9 50.19,12.11 50.4,12.32 50.4,20.37 49.81,20.96 40.03,20.96 arc90 39.8,20.72 arc-90 39.29,20.21 38.26,20.21 arc-90 37.74,20.72 arc90 37.51,20.96 32.28,20.96 23.49,12.17 23.37,12.17 23.37,12.16 16.12,12.16 15.37,12.92 15.37,13.56 J1.7
TMDS_D0_B_N
  Top 0.152: MICROHDMI2.11 64.43,12.11 64.22,12.31 64.22,21.15 58.55,26.82 | J2.9 15.9,25.83 15.63,25.56 15.63,25.23 18.96,21.89 24.55,21.89 30.14,27.48 57.88,27.48 58.55,26.82 | 58.55,26.82
TMDS_D0_B_P
  Top 0.152: MICROHDMI2.9 63.73,12.11 63.94,12.32 63.94,21.03 57.76,27.21 30.26,27.21 24.66,21.61 18.84,21.61 15.35,25.11 15.35,25.56 15.07,25.83 J2.7
TMDS_D1_A_N
  Bottom 0.127: J1.6 14.37,13.69 13.95,13.26
  Bottom 0.152: MICROHDMI1.8 49.84,12.11 49.63,12.32 49.63,17.09 48.93,17.78 30.12,17.78 25.15,12.82 25.15,10.39 24.14,9.38 17.38,9.38 13.95,12.81 13.95,13.26
TMDS_D1_A_P
  Bottom 0.127: J1.4 13.22,13.71 13.67,13.26
  Bottom 0.152: MICROHDMI1.6 49.14,12.11 49.35,12.32 49.35,16.97 48.81,17.5 30.23,17.5 25.43,12.7 25.43,10.28 24.25,9.1 17.26,9.1 13.67,12.69 13.67,13.26
TMDS_D1_B_N
  Bottom 0.127: J2.6 14.38,25.58 13.95,25.15
  Bottom 0.152: MICROHDMI2.8 63.38,12.11 63.16,12.32 63.16,18.72 56.53,25.35 29.99,25.35 24.9,20.27 19.15,20.27 15.16,24.26 14.25,24.26 13.95,24.57 13.95,25.15
TMDS_D1_B_P
  Bottom 0.127: J2.4 13.23,25.59 13.67,25.15
  Bottom 0.152: MICROHDMI2.6 62.68,12.11 62.89,12.32 62.89,18.61 56.42,25.07 30.1,25.07 25.02,19.99 19.04,19.99 15.04,23.98 14.14,23.98 13.67,24.45 13.67,25.15
TMDS_D2_A_N
  Top 0.152: MICROHDMI1.5 48.79,12.11 48.58,12.32 48.58,16.52 45.51,19.59 32.38,19.59 25.89,13.1 25.89,11.59 24.24,9.94 17.18,9.94 14.64,12.48 12.48,12.48 12.22,12.73 12.22,13.56 J1.3
TMDS_D2_A_P
  Top 0.152: MICROHDMI1.3 48.09,12.11 48.3,12.32 48.3,16.4 45.39,19.31 32.49,19.31 26.17,12.98 26.17,11.47 24.35,9.66 17.06,9.66 14.52,12.2 12.36,12.2 11.94,12.61 11.94,13.57 11.54,13.98 J1.1
TMDS_D2_B_N
  Top 0.152: MICROHDMI2.5 62.33,12.11 62.12,12.32 62.12,19.16 55.91,25.37 29.9,25.37 24.68,20.14 19.28,20.14 15.09,24.34 12.58,24.34 12.22,24.69 12.22,25.41 J2.3
TMDS_D2_B_P
  Top 0.152: MICROHDMI2.3 61.63,12.11 61.84,12.32 61.84,19.05 55.79,25.09 30.02,25.09 24.8,19.87 19.17,19.87 14.98,24.06 12.46,24.06 11.94,24.58 11.94,25.38 J2.1
VBUS  (via drill 0.35)
  Top 0.152: SV1.P$2 SV1.2
  Top 0.254: v77.58,12.85 77.57,12.84 USBC.A4 | USBC.B4 v80.07,13.08
  Bottom 0.254: U2.B9 8.76,49.8 | 11.6,49.9 11.71,49.79 U2.A9 | v80.07,13.08 USBC.B4 | USBC.A4 77.57,12.75 77.58,12.75 77.58,12.87 v77.58,12.85 | SV1.2 62.83,31.96 62.43,31.55 62.43,28.71 69.57,21.57 | 77.83,22.67 77.8,22.7 | 76.85,21.75 76.85,21.57
  Bottom 0.305: 11,50.55 11.6,49.9 | 8.76,49.8 9.51,50.55
  Bottom 0.406: 9.51,50.55 10.2,50.56 11,50.55 | 69.57,21.57 76.85,21.57 | JP2.2 77.83,22.67 | 77.8,22.7 76.85,21.75
  Bottom 0.61: 10.2,50.56 10.2,51.45 10.62,51.8 | 77.58,12.75 77.58,13.69 | v77.58,12.85 77.58,17.42 | 76.85,18.1 76.85,21.57
  Bottom 0.762: v80.07,13.08 80.07,13.54 79.1,14.51 78.69,14.51 78.39,14.51 77.58,13.69 | 77.53,17.42 76.85,18.1
  Bottom 0.813: 77.58,17.42 77.53,17.42
  Bottom 1.016: 10.62,51.8 11.16,52.25 16.02,52.25
  Bottom 1.27: 74.11,49.91 73.83,49.63 75.1,49.63 | J5.P$1 76.46,48.27
  Bottom 1.524: J5.P$1 81.86,48.27
  Bottom 1.778: 78.69,15.52 78.69,14.51
  Bottom 2.032: 80.4,17.22 78.69,15.52
  Bottom 2.286: 16.02,52.25 18.37,49.91 | 76.46,48.27 75.1,49.63 | 83.53,49.94 81.86,48.27 | 86.55,17.22 80.4,17.22
  Bottom 2.54: 86.82,49.94 83.53,49.94
  Bottom 3.048: 90.17,20.85 86.55,17.22 | 86.82,49.94 90.17,46.59
  Bottom 3.556: 74.11,49.91 18.37,49.91 | 90.17,46.59 90.17,20.85
VDD_SD
  Top 0.305: U4.P$4 17.45,39.45 17.81,39.81 17.81,41.83 18.89,42.91 19.88,42.91 21.84,40.96 J4.5

## Text on the board
tPlace: UBO Side Board V1.4 12/21/2021 | USB 2.0 | USB Power | MicroSD Card | HDMI 2 | Right / Speaker / (CNR) | AUD_CON | CPU FAN | HDMI 1 | USB C | MicroHDMI1 | MicroHDMI2 | U1 | Speaker / Left | Speaker / Left (CNL)
bPlace: VBUS | U3 | Power Button | I2C 2 (stemma) | I2C 1 (stemma)